# Altium PCB MainPCB.PcbDoc (part 4 of 4)
Units mil, origin at the board's own origin, x right, y up, seen from the top; angles counter-clockwise.
Board outline 3543.31 x 3543.31 mil, 2 copper layers (Top Layer, Bottom Layer); 134 components, 141 nets, 686 pads, 3686 vias.
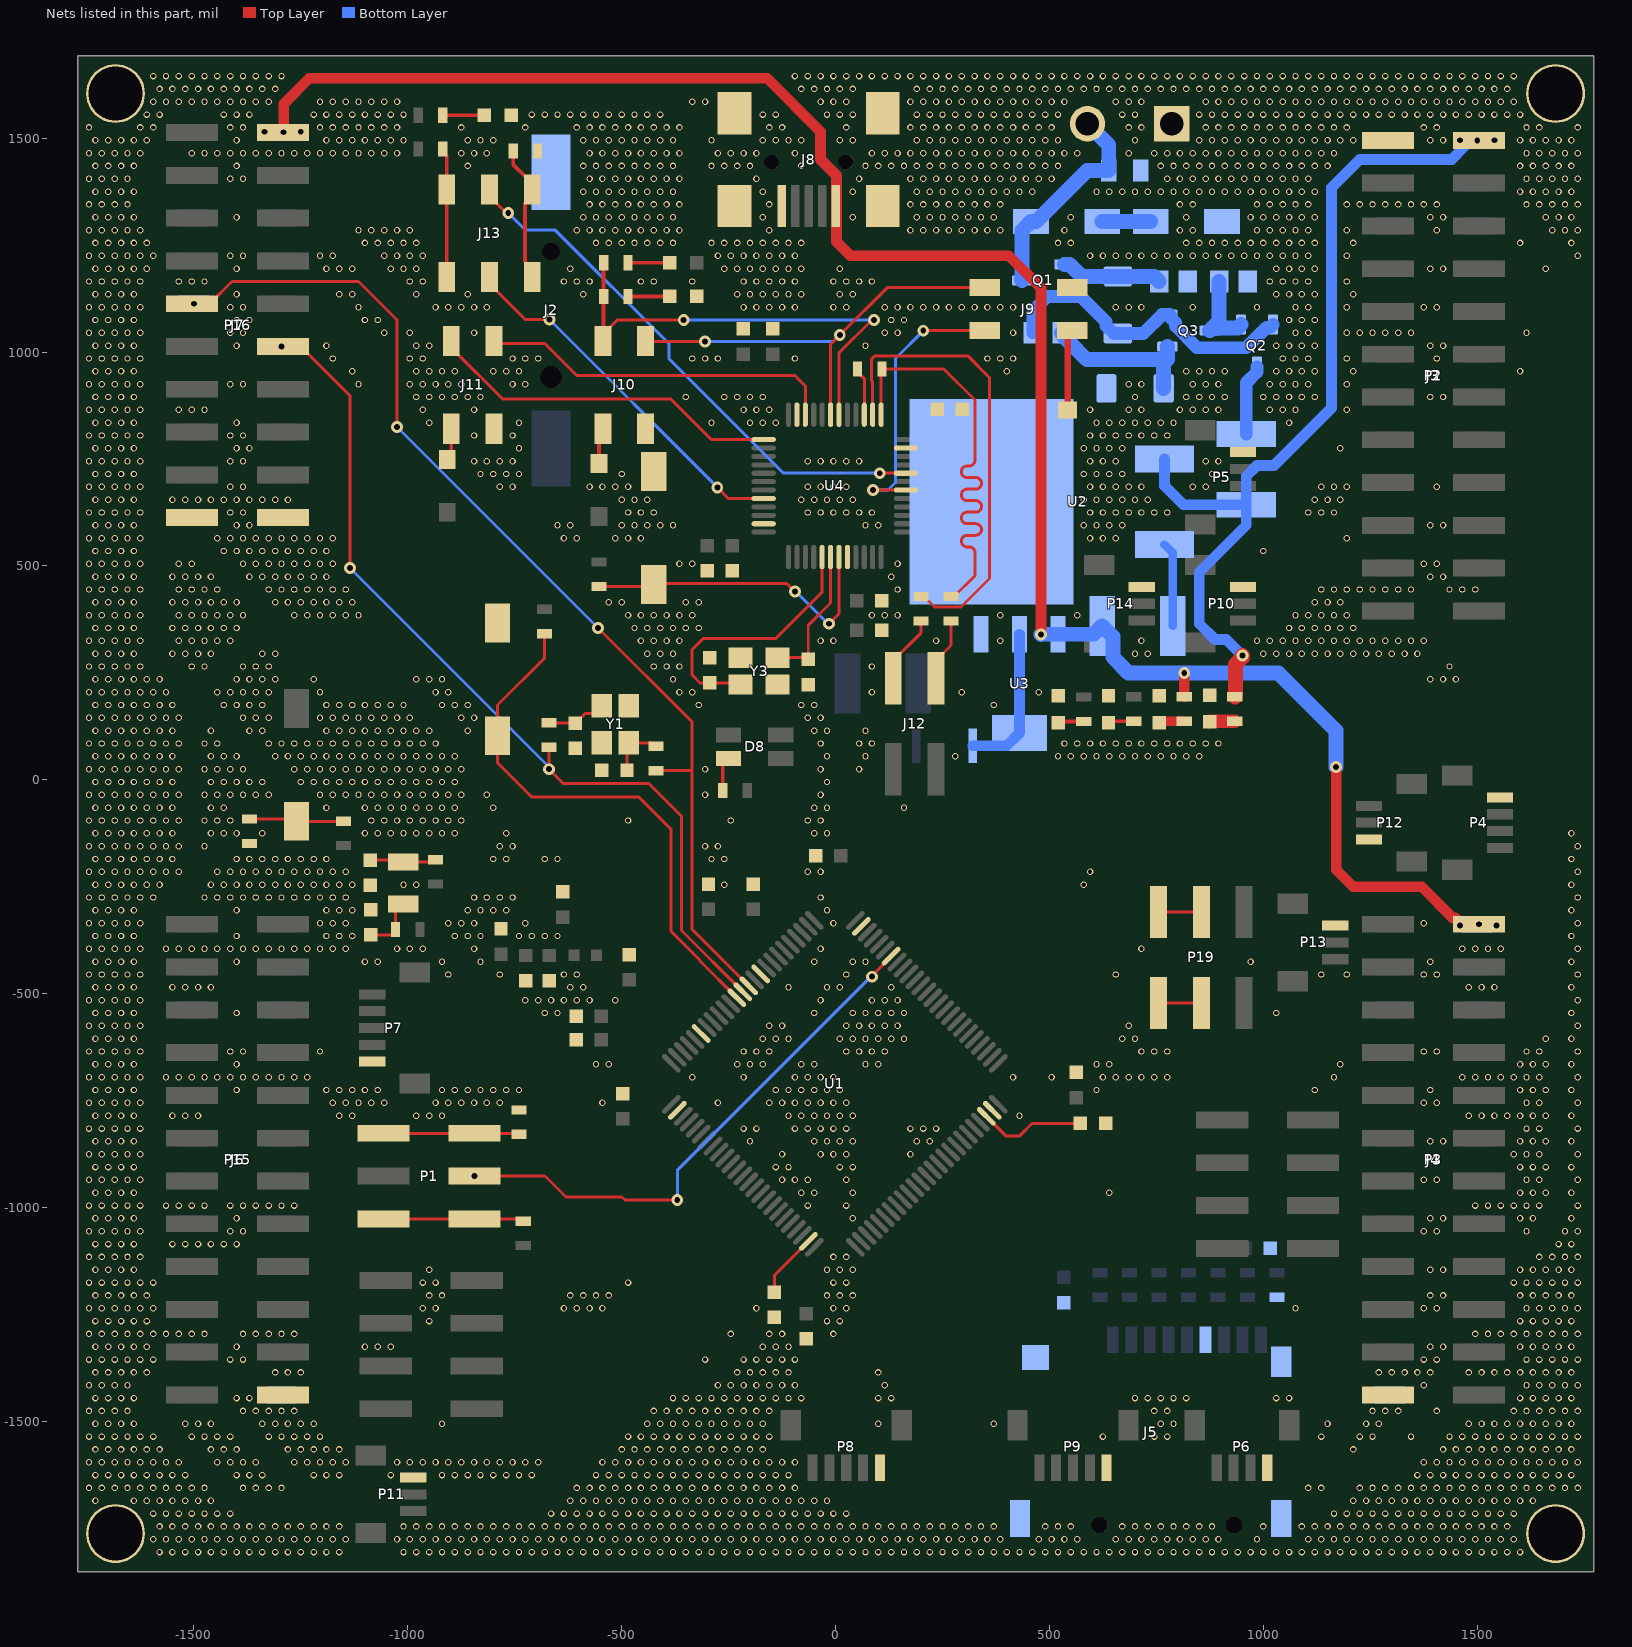
[diagram p3: the nets of this part, all layers, seen from the top]

## Via types
v1: diameter 15/15 (per signal layer), hole 10, Top Layer to Bottom Layer, tented both sides, 3436 vias
v2: diameter 27.56, hole 13.78, Top Layer to Bottom Layer, 250 vias

## Nets (pads, with @x,y where several pads share a name; then routed paths per layer and width w, separated by ;. In a path a pad name is that pad's centre, name@x,y a point inside that pad or via, vN(x,y) a via of type N, cw(c..) or ccw(c..) an arc to the next point about the centre after c; other vN are vias at no path point) (continued)
GND: C1.1 C2.1 C3.1 C4.1 C5.1 C6.1 C7.1 C8.1 C9.1 C10.1 C11.1 C12.1 C13.1 C14.1 C15.1 C16.1 C17.1 C18.1 C19.1 C20.1 C21.1 C22.1 C23.1 C24.1 C25.1 C26.1 C27.1 C28.1 C29.1 C30.1 C31.1 C32.1 D1.1 D4.C D5.A D6.1 D7.1 D9.1 D14.1 D15.1 J1.1 J2.N J3.23 J4.24 J5.6 J5.G1 J5.G2 J5.G3 J5.G4 J6.23 J7.19 J7.20 J8.5 J8.Shell J9.4 J10.4 J11.4 P2.24 P3.23 P4.4 P5.4 P6.4 P7.5 P8.5 P9.5 P10.3 P11.3 P12.3 P13.3 P14.3 P15.24 P16.19 P16.20 R3.1 R10.1 R12.1 R13.1 R22.1 R31.1 Scr1.1 Scr2.1 Scr3.1 Scr4.1 SW2.1 SW3.1 U1.10 U1.20 U1.27 U1.74 U1.99 U2.3 U3.1 U4.8 U4.23 U4.35 U4.47 Y1.2 Y1.4 Y3.2 Y3.4
  other v1: -1580,-1805 -1550,-1805 -1520,-1805 -1490,-1805 -1460,-1805 -1430,-1805 -1400,-1805 -1370,-1805 -1340,-1805 -1310,-1805 -1280,-1805 -1250,-1805 -1220,-1805 -1190,-1805 -1160,-1805 -1010,-1805 -980,-1805 -950,-1805 -920,-1805 -890,-1805 -860,-1805 -830,-1805 -800,-1805 -770,-1805 -740,-1805 -710,-1805 -680,-1805 -650,-1805 -620,-1805 -590,-1805 -560,-1805 -530,-1805 -500,-1805 -470,-1805 -440,-1805 -410,-1805 -380,-1805 -350,-1805 -320,-1805 -290,-1805 -260,-1805 -230,-1805 -200,-1805 -170,-1805 -140,-1805 -110,-1805 -80,-1805 -50,-1805 -20,-1805 10,-1805 40,-1805 70,-1805 100,-1805 130,-1805 160,-1805 190,-1805 220,-1805 250,-1805 280,-1805 310,-1805 340,-1805 370,-1805 400,-1805 430,-1805 460,-1805 490,-1805 520,-1805 550,-1805 580,-1805 610,-1805 640,-1805 670,-1805 700,-1805 730,-1805 760,-1805 790,-1805 820,-1805 850,-1805 880,-1805 910,-1805 940,-1805 970,-1805 1000,-1805 1030,-1805 1060,-1805 1090,-1805 1120,-1805 1150,-1805 1180,-1805 1210,-1805 1240,-1805 1270,-1805 1300,-1805 1330,-1805 1360,-1805 1390,-1805 1420,-1805 1450,-1805 1480,-1805 1510,-1805 1540,-1805 1570,-1805 1600,-1805 -1595,-1775 -1565,-1775 -1535,-1775 -1505,-1775 -1475,-1775 -1445,-1775 -1415,-1775 -1385,-1775 -1355,-1775 -1325,-1775 -1295,-1775 -1265,-1775 -1235,-1775 -1205,-1775 -1175,-1775 -1145,-1775 -1025,-1775 -995,-1775 -965,-1775 -935,-1775 -905,-1775 -875,-1775 -845,-1775 -815,-1775 -785,-1775 -755,-1775 -725,-1775 -695,-1775 -665,-1775 -635,-1775 -605,-1775 -575,-1775 -545,-1775 -515,-1775 -485,-1775 -455,-1775 -425,-1775 -395,-1775 -365,-1775 -335,-1775 -305,-1775 -275,-1775 -245,-1775 -215,-1775 -185,-1775 -155,-1775 -125,-1775 -95,-1775 -65,-1775 -35,-1775 -5,-1775 25,-1775 55,-1775 85,-1775 115,-1775 145,-1775 175,-1775 205,-1775 235,-1775 265,-1775 295,-1775 325,-1775 355,-1775 385,-1775 475,-1775 505,-1775 535,-1775 565,-1775 655,-1775 685,-1775 715,-1775 745,-1775 775,-1775 805,-1775 835,-1775 865,-1775 895,-1775 985,-1775 1105,-1775 1135,-1775 1165,-1775 1195,-1775 1225,-1775 1255,-1775 1285,-1775 1315,-1775 1345,-1775 1375,-1775 1405,-1775 1435,-1775 1465,-1775 1495,-1775 1525,-1775 1555,-1775 1585,-1775 -1580,-1745 -1550,-1745 -1520,-1745 -1490,-1745 -1460,-1745 -1430,-1745 -1400,-1745 -1370,-1745 -1340,-1745 -1310,-1745 -1280,-1745 -1250,-1745 -1220,-1745 -1190,-1745 -1160,-1745 -1010,-1745 -980,-1745 -950,-1745 -920,-1745 -890,-1745 -860,-1745 -830,-1745 -800,-1745 -770,-1745 -740,-1745 -710,-1745 -680,-1745 -650,-1745 -620,-1745 -590,-1745 -560,-1745 -530,-1745 -500,-1745 -470,-1745 -440,-1745 -410,-1745 -380,-1745 -350,-1745 -320,-1745 -290,-1745 -260,-1745 -230,-1745 -200,-1745 -170,-1745 -140,-1745 -110,-1745 -80,-1745 -50,-1745 -20,-1745 10,-1745 40,-1745 70,-1745 100,-1745 130,-1745 160,-1745 190,-1745 220,-1745 250,-1745 280,-1745 310,-1745 340,-1745 370,-1745 490,-1745 520,-1745 550,-1745 670,-1745 700,-1745 730,-1745 760,-1745 790,-1745 820,-1745 850,-1745 880,-1745 1000,-1745 1090,-1745 1120,-1745 1150,-1745 1180,-1745 1210,-1745 1240,-1745 1270,-1745 1300,-1745 1330,-1745 1360,-1745 1390,-1745 1420,-1745 1450,-1745 1480,-1745 1510,-1745 1540,-1745 1570,-1745 -1595,-1715 -1565,-1715 -1535,-1715 -1505,-1715 -1475,-1715 -1445,-1715 -1415,-1715 -665,-1715 -635,-1715 -605,-1715 -575,-1715 -545,-1715 -515,-1715 -485,-1715 -455,-1715 -425,-1715 -395,-1715 -365,-1715 -335,-1715 -305,-1715 -275,-1715 -245,-1715 -215,-1715 -185,-1715 -155,-1715 -125,-1715 -95,-1715 -65,-1715 -35,-1715 -5,-1715 25,-1715 1165,-1715 1195,-1715 1225,-1715 1255,-1715 1285,-1715 1315,-1715 1345,-1715 1375,-1715 1405,-1715 1435,-1715 1465,-1715 1495,-1715 1525,-1715 1555,-1715 1585,-1715 -1730,-1685 -1640,-1685 -1610,-1685 -1580,-1685 -1550,-1685 -1520,-1685 -1490,-1685 -1460,-1685 -620,-1685 -590,-1685 -560,-1685 -530,-1685 -500,-1685 -470,-1685 -440,-1685 -410,-1685 -380,-1685 -350,-1685 -320,-1685 -290,-1685 -260,-1685 -230,-1685 -200,-1685 -170,-1685 -140,-1685 -110,-1685 -80,-1685 -50,-1685 -20,-1685 1210,-1685 1240,-1685 1270,-1685 1300,-1685 1330,-1685 1360,-1685 1390,-1685 1420,-1685 1450,-1685 1480,-1685 1510,-1685 1540,-1685 1570,-1685 1600,-1685 1630,-1685 -1745,-1655 -1715,-1655 -1685,-1655 -1655,-1655 -1625,-1655 -1595,-1655 -1565,-1655 -1535,-1655 -1505,-1655 -1475,-1655 -1385,-1655 -1355,-1655 -1325,-1655 -1295,-1655 -605,-1655 -575,-1655 -545,-1655 -515,-1655 -485,-1655 -455,-1655 -425,-1655 -395,-1655 -365,-1655 -335,-1655 -305,-1655 -275,-1655 -245,-1655 -215,-1655 -185,-1655 -155,-1655 -125,-1655 -95,-1655 1105,-1655 1135,-1655 1225,-1655 1255,-1655 1285,-1655 1315,-1655 1345,-1655 1375,-1655 1405,-1655 1435,-1655 1465,-1655 1495,-1655 1525,-1655 1555,-1655 1585,-1655 1615,-1655 1645,-1655 1675,-1655 1705,-1655 1735,-1655 -1730,-1625 -1700,-1625 -1670,-1625 -1640,-1625 -1610,-1625 -1580,-1625 -1550,-1625 -1520,-1625 -1400,-1625 -1370,-1625 -1340,-1625 -1220,-1625 -1190,-1625 -1160,-1625 -1040,-1625 -920,-1625 -890,-1625 -860,-1625 -830,-1625 -800,-1625 -770,-1625 -740,-1625 -710,-1625 -560,-1625 -530,-1625 -500,-1625 -470,-1625 -440,-1625 -410,-1625 -380,-1625 -350,-1625 -320,-1625 -290,-1625 -260,-1625 -230,-1625 -200,-1625 -170,-1625 -140,-1625 -110,-1625 1360,-1625 1390,-1625 1420,-1625 1450,-1625 1480,-1625 1510,-1625 1540,-1625 1570,-1625 1600,-1625 1630,-1625 1660,-1625 1690,-1625 1720,-1625 -1745,-1595 -1715,-1595 -1685,-1595 -1655,-1595 -1625,-1595 -1595,-1595 -1565,-1595 -1535,-1595 -1445,-1595 -1415,-1595 -1385,-1595 -1355,-1595 -1265,-1595 -1235,-1595 -1205,-1595 -1175,-1595 -1145,-1595 -1025,-1595 -995,-1595 -965,-1595 -935,-1595 -905,-1595 -875,-1595 -845,-1595 -815,-1595 -785,-1595 -755,-1595 -725,-1595 -695,-1595 -545,-1595 -515,-1595 -485,-1595 -455,-1595 -425,-1595 -395,-1595 -365,-1595 -335,-1595 -305,-1595 -275,-1595 -245,-1595 -215,-1595 -185,-1595 -155,-1595 -125,-1595 -95,-1595 1375,-1595 1405,-1595 1435,-1595 1465,-1595 1495,-1595 1525,-1595 1555,-1595 1585,-1595 1615,-1595 1645,-1595 1675,-1595 1705,-1595 1735,-1595 -1730,-1565 -1700,-1565 -1670,-1565 -1640,-1565 -1610,-1565 -1580,-1565 -1460,-1565 -1430,-1565 -1400,-1565 -1280,-1565 -1250,-1565 -1220,-1565 -1190,-1565 -1160,-1565 -500,-1565 -470,-1565 -440,-1565 -410,-1565 -380,-1565 -350,-1565 -320,-1565 -290,-1565 -260,-1565 -230,-1565 -200,-1565 -170,-1565 1210,-1565 1420,-1565 1450,-1565 1480,-1565 1510,-1565 1540,-1565 1570,-1565 1600,-1565 1630,-1565 1660,-1565 1690,-1565 1720,-1565 -1745,-1535 -1715,-1535 -1685,-1535 -1655,-1535 -1625,-1535 -1595,-1535 -1505,-1535 -1475,-1535 -1445,-1535 -1415,-1535 -1325,-1535 -1295,-1535 -1265,-1535 -1235,-1535 -1205,-1535 -485,-1535 -455,-1535 -425,-1535 -395,-1535 -365,-1535 -335,-1535 -305,-1535 -275,-1535 -245,-1535 -215,-1535 -185,-1535 -155,-1535 625,-1535 745,-1535 775,-1535 1135,-1535 1225,-1535 1255,-1535 1345,-1535 1435,-1535 1465,-1535 1495,-1535 1525,-1535 1555,-1535 1585,-1535 1615,-1535 1645,-1535 1675,-1535 1705,-1535 1735,-1535 -1730,-1505 -1700,-1505 -1670,-1505 -1640,-1505 -1520,-1505 -1490,-1505 -1460,-1505 -1340,-1505 -1310,-1505 -1280,-1505 -1250,-1505 -1220,-1505 -920,-1505 -440,-1505 -410,-1505 -380,-1505 -350,-1505 -320,-1505 -290,-1505 -260,-1505 -230,-1505 -200,-1505 -170,-1505 100,-1505 370,-1505 760,-1505 790,-1505 1150,-1505 1240,-1505 1270,-1505 1480,-1505 1510,-1505 1540,-1505 1570,-1505 1600,-1505 1630,-1505 1660,-1505 1690,-1505 1720,-1505 -1745,-1475 -1715,-1475 -1685,-1475 -1655,-1475 -1385,-1475 -1355,-1475 -1325,-1475 -1295,-1475 -1265,-1475 -425,-1475 -395,-1475 -365,-1475 -335,-1475 -305,-1475 -275,-1475 -245,-1475 -215,-1475 -185,-1475 -155,-1475 745,-1475 775,-1475 1255,-1475 1285,-1475 1315,-1475 1405,-1475 1585,-1475 1615,-1475 1645,-1475 1675,-1475 1705,-1475 1735,-1475 -1730,-1445 -1700,-1445 -1670,-1445 -1640,-1445 -1400,-1445 -1370,-1445 -380,-1445 -350,-1445 -320,-1445 -290,-1445 -260,-1445 -230,-1445 -200,-1445 -170,-1445 -140,-1445 -110,-1445 -80,-1445 100,-1445 130,-1445 700,-1445 730,-1445 760,-1445 790,-1445 820,-1445 1030,-1445 1060,-1445 1600,-1445 1630,-1445 1660,-1445 1690,-1445 1720,-1445 -1745,-1415 -1715,-1415 -1685,-1415 -1655,-1415 -275,-1415 -245,-1415 -215,-1415 -185,-1415 -155,-1415 -125,-1415 -95,-1415 115,-1415 1375,-1415 1615,-1415 1645,-1415 1675,-1415 1705,-1415 1735,-1415 -1730,-1385 -1700,-1385 -1670,-1385 -1640,-1385 -1610,-1385 -1310,-1385 -1280,-1385 -1250,-1385 -230,-1385 -200,-1385 -170,-1385 -140,-1385 -110,-1385 100,-1385 1270,-1385 1300,-1385 1330,-1385 1360,-1385 1390,-1385 1480,-1385 1510,-1385 1540,-1385 1570,-1385 1600,-1385 1630,-1385 1660,-1385 1690,-1385 1720,-1385 -1745,-1355 -1715,-1355 -1685,-1355 -1655,-1355 -1625,-1355 -1595,-1355 -1415,-1355 -1385,-1355 -305,-1355 -215,-1355 -185,-1355 -155,-1355 -125,-1355 -95,-1355 1375,-1355 1405,-1355 1615,-1355 1645,-1355 1675,-1355 1705,-1355 1735,-1355 -1730,-1325 -1700,-1325 -1670,-1325 -1640,-1325 -1610,-1325 -1400,-1325 -1100,-1325 -1070,-1325 -1040,-1325 -170,-1325 -140,-1325 -110,-1325 1390,-1325 1420,-1325 1600,-1325 1630,-1325 1660,-1325 1690,-1325 1720,-1325 -1745,-1295 -1715,-1295 -1685,-1295 -1655,-1295 -1625,-1295 -1595,-1295 -1565,-1295 -1535,-1295 -1505,-1295 -1475,-1295 -1385,-1295 -1355,-1295 -1325,-1295 -1295,-1295 -1265,-1295 -245,-1295 -155,-1295 -125,-1295 -5,-1295 1495,-1295 1525,-1295 1555,-1295 1585,-1295 1615,-1295 1645,-1295 1675,-1295 1705,-1295 1735,-1295 -1730,-1265 -1700,-1265 -1670,-1265 -1640,-1265 -1610,-1265 -950,-1265 -20,-1265 10,-1265 1600,-1265 1630,-1265 1660,-1265 1690,-1265 1720,-1265 -1745,-1235 -1715,-1235 -1685,-1235 -1655,-1235 -1625,-1235 -1595,-1235 -965,-1235 -935,-1235 -635,-1235 -605,-1235 -575,-1235 -545,-1235 -185,-1235 -5,-1235 25,-1235 1075,-1235 1375,-1235 1405,-1235 1615,-1235 1645,-1235 1675,-1235 1705,-1235 1735,-1235 -1730,-1205 -1700,-1205 -1670,-1205 -1640,-1205 -1610,-1205 -950,-1205 -920,-1205 -620,-1205 -590,-1205 -560,-1205 -530,-1205 -20,-1205 10,-1205 40,-1205 1390,-1205 1420,-1205 1600,-1205 1630,-1205 1660,-1205 1690,-1205 1720,-1205 -1745,-1175 -1715,-1175 -1685,-1175 -1655,-1175 -1625,-1175 -1595,-1175 -965,-1175 -935,-1175 -485,-1175 -5,-1175 25,-1175 1585,-1175 1615,-1175 1645,-1175 1675,-1175 1705,-1175 1735,-1175 -1730,-1145 -1700,-1145 -1670,-1145 -1640,-1145 -950,-1145 -20,-1145 10,-1145 40,-1145 1390,-1145 1420,-1145 1600,-1145 1630,-1145 1660,-1145 1690,-1145 1720,-1145 -1745,-1115 -1715,-1115 -1685,-1115 -1655,-1115 -1625,-1115 -5,-1115 25,-1115 1645,-1115 1675,-1115 1705,-1115 1735,-1115 -1730,-1085 -1700,-1085 -1670,-1085 -1640,-1085 -1550,-1085 -1520,-1085 -1490,-1085 -1460,-1085 -1430,-1085 -1400,-1085 1690,-1085 1720,-1085 -1745,-1055 -1715,-1055 -1685,-1055 -1655,-1055 -1625,-1055 -1415,-1055 -1385,-1055 1375,-1055 1405,-1055 1615,-1055 1705,-1055 1735,-1055 -1730,-1025 -1700,-1025 -1670,-1025 -1640,-1025 -1400,-1025 40,-1025 1390,-1025 1420,-1025 1600,-1025 1630,-1025 1720,-1025 -1745,-995 -1715,-995 -1685,-995 -1655,-995 -1625,-995 -1565,-995 -1535,-995 -1505,-995 -1475,-995 -1415,-995 -1385,-995 -1355,-995 -1325,-995 -1295,-995 -1265,-995 -65,-995 25,-995 1495,-995 1525,-995 1555,-995 1585,-995 1615,-995 1645,-995 1735,-995 -1730,-965 -1700,-965 -1670,-965 -1640,-965 -80,-965 -50,-965 40,-965 640,-965 1600,-965 1630,-965 1660,-965 1720,-965 -1745,-935 -1715,-935 -1685,-935 -1655,-935 -1625,-935 -125,-935 -95,-935 -65,-935 25,-935 1375,-935 1405,-935 1615,-935 1645,-935 1735,-935 -1730,-905 -1700,-905 -1670,-905 -1640,-905 -140,-905 -110,-905 10,-905 40,-905 1600,-905 1630,-905 1660,-905 1720,-905 -1745,-875 -1715,-875 -1685,-875 -1655,-875 -1625,-875 -125,-875 -35,-875 -5,-875 25,-875 175,-875 1585,-875 1615,-875 1645,-875 1735,-875 -1730,-845 -1700,-845 -1670,-845 -1640,-845 -200,-845 -50,-845 -20,-845 10,-845 40,-845 190,-845 220,-845 1390,-845 1420,-845 1600,-845 1630,-845 1660,-845 1720,-845 -1745,-815 -1715,-815 -1685,-815 -1655,-815 -1625,-815 -215,-815 -185,-815 -95,-815 -65,-815 -35,-815 -5,-815 25,-815 175,-815 205,-815 235,-815 1615,-815 1645,-815 1735,-815 -1730,-785 -1700,-785 -1670,-785 -1640,-785 -1550,-785 -1520,-785 -1490,-785 -1160,-785 -1130,-785 -980,-785 -950,-785 -920,-785 -110,-785 -80,-785 -50,-785 -20,-785 10,-785 40,-785 430,-785 1480,-785 1510,-785 1540,-785 1570,-785 1600,-785 1630,-785 1660,-785 1720,-785 -1745,-755 -1715,-755 -1685,-755 -1655,-755 -1625,-755 -1175,-755 -1145,-755 -1115,-755 -1085,-755 -1055,-755 -935,-755 -905,-755 -875,-755 -845,-755 -815,-755 -785,-755 -545,-755 -275,-755 -155,-755 -125,-755 -95,-755 -65,-755 -35,-755 -5,-755 25,-755 1375,-755 1405,-755 1615,-755 1645,-755 1735,-755 -1730,-725 -1700,-725 -1670,-725 -1640,-725 -1400,-725 -1190,-725 -1160,-725 -1130,-725 -1100,-725 -1070,-725 -920,-725 -890,-725 -860,-725 -830,-725 -800,-725 -770,-725 -740,-725 -140,-725 -110,-725 -80,-725 -50,-725 -20,-725 10,-725 610,-725 1120,-725 1390,-725 1600,-725 1630,-725 1660,-725 1720,-725 -1745,-695 -1715,-695 -1685,-695 -1655,-695 -1625,-695 -1565,-695 -1535,-695 -1505,-695 -1475,-695 -1445,-695 -1415,-695 -1385,-695 -1355,-695 -1325,-695 -1295,-695 -1265,-695 -1235,-695 -335,-695 -215,-695 -95,-695 -65,-695 -35,-695 -5,-695 415,-695 505,-695 625,-695 655,-695 685,-695 715,-695 745,-695 775,-695 1165,-695 1465,-695 1495,-695 1525,-695 1555,-695 1585,-695 1615,-695 1645,-695 1735,-695 -1730,-665 -1700,-665 -1670,-665 -1640,-665 -1400,-665 -560,-665 -530,-665 -230,-665 -200,-665 -170,-665 -80,-665 -50,-665 70,-665 100,-665 610,-665 640,-665 1180,-665 1600,-665 1630,-665 1660,-665 1720,-665 -1745,-635 -1715,-635 -1685,-635 -1655,-635 -1625,-635 -1415,-635 -1385,-635 -1205,-635 -215,-635 -185,-635 -155,-635 25,-635 55,-635 85,-635 115,-635 715,-635 745,-635 775,-635 1375,-635 1405,-635 1615,-635 1645,-635 1735,-635 -1730,-605 -1700,-605 -1670,-605 -1640,-605 -170,-605 -140,-605 -110,-605 10,-605 40,-605 70,-605 100,-605 130,-605 160,-605 670,-605 700,-605 1660,-605 1720,-605 -1745,-575 -1715,-575 -1685,-575 -1655,-575 -1625,-575 -155,-575 -125,-575 25,-575 55,-575 85,-575 115,-575 145,-575 685,-575 1735,-575 -1730,-545 -1700,-545 -1670,-545 -1640,-545 -1400,-545 -680,-545 -650,-545 -50,-545 40,-545 70,-545 100,-545 130,-545 160,-545 1030,-545 1720,-545 -1745,-515 -1715,-515 -1685,-515 -1655,-515 -1625,-515 -725,-515 -695,-515 -665,-515 -635,-515 -605,-515 -575,-515 -515,-515 -35,-515 85,-515 115,-515 145,-515 1735,-515 -1730,-485 -1700,-485 -1670,-485 -1640,-485 -1550,-485 -1520,-485 -1490,-485 -1460,-485 -620,-485 -590,-485 -110,-485 -20,-485 10,-485 130,-485 1480,-485 1510,-485 1540,-485 1720,-485 -1745,-455 -1715,-455 -1685,-455 -1655,-455 -1625,-455 -905,-455 -785,-455 -635,-455 -605,-455 25,-455 655,-455 1135,-455 1195,-455 1375,-455 1405,-455 1735,-455 -1730,-425 -1700,-425 -1670,-425 -1640,-425 -1400,-425 -1100,-425 -1070,-425 -920,-425 -830,-425 -50,-425 40,-425 70,-425 970,-425 1390,-425 1720,-425 -1745,-395 -1715,-395 -1685,-395 -1655,-395 -1625,-395 -1565,-395 -1535,-395 -1505,-395 -1475,-395 -1445,-395 -1415,-395 -1385,-395 -1355,-395 -1325,-395 -1295,-395 -1265,-395 -1235,-395 -1205,-395 -1175,-395 -1145,-395 -1025,-395 -995,-395 -965,-395 -845,-395 -35,-395 715,-395 1465,-395 1495,-395 1525,-395 1555,-395 1735,-395 -1730,-365 -1700,-365 -1670,-365 -1640,-365 -1400,-365 -1190,-365 -1160,-365 -1130,-365 -890,-365 -860,-365 -830,-365 -740,-365 -710,-365 -680,-365 -650,-365 1720,-365 -1745,-335 -1715,-335 -1685,-335 -1655,-335 -1625,-335 -1205,-335 -1175,-335 -1145,-335 -905,-335 -875,-335 -845,-335 -725,-335 -5,-335 1375,-335 1735,-335 -1730,-305 -1700,-305 -1670,-305 -1640,-305 -1400,-305 -1190,-305 -1160,-305 -1130,-305 -860,-305 -830,-305 -800,-305 -770,-305 -20,-305 1720,-305 -1745,-275 -1715,-275 -1685,-275 -1655,-275 -1625,-275 -1595,-275 -1475,-275 -1445,-275 -1415,-275 -1385,-275 -1355,-275 -1325,-275 -1295,-275 -1265,-275 -1235,-275 -1205,-275 -1175,-275 -1145,-275 -845,-275 -815,-275 -785,-275 -755,-275 -35,-275 1735,-275 -1730,-245 -1700,-245 -1670,-245 -1640,-245 -1610,-245 -1580,-245 -1460,-245 -1430,-245 -1400,-245 -1370,-245 -1340,-245 -1310,-245 -1280,-245 -1250,-245 -1220,-245 -1190,-245 -1160,-245 -1130,-245 -1010,-245 -980,-245 -260,-245 580,-245 1720,-245 -1745,-215 -1715,-215 -1685,-215 -1655,-215 -1625,-215 -1595,-215 -1565,-215 -1535,-215 -1445,-215 -1415,-215 -1385,-215 -1355,-215 -1325,-215 -1295,-215 -1265,-215 -1235,-215 -1205,-215 -1175,-215 -1145,-215 -65,-215 -35,-215 595,-215 1735,-215 -1730,-185 -1700,-185 -1670,-185 -1640,-185 -1610,-185 -1580,-185 -1550,-185 -1400,-185 -1370,-185 -1340,-185 -1310,-185 -1280,-185 -1250,-185 -1220,-185 -1190,-185 -800,-185 -770,-185 -680,-185 -650,-185 -290,-185 -260,-185 1720,-185 -1745,-155 -1715,-155 -1685,-155 -1655,-155 -1625,-155 -1595,-155 -1565,-155 -1535,-155 -1475,-155 -785,-155 -755,-155 -305,-155 -275,-155 1735,-155 -1730,-125 -1700,-125 -1670,-125 -1640,-125 -1610,-125 -1580,-125 -1550,-125 -1460,-125 -1430,-125 -1400,-125 -1340,-125 -1100,-125 -1070,-125 -1040,-125 -1010,-125 -980,-125 -950,-125 -920,-125 -890,-125 -770,-125 -50,-125 -20,-125 1720,-125 -1745,-95 -1715,-95 -1685,-95 -1655,-95 -1625,-95 -1595,-95 -1565,-95 -1535,-95 -1475,-95 -1445,-95 -1415,-95 -1085,-95 -1055,-95 -1025,-95 -995,-95 -965,-95 -935,-95 -905,-95 -875,-95 -485,-95 -245,-95 -65,-95 -35,-95 -1730,-65 -1700,-65 -1670,-65 -1640,-65 -1610,-65 -1580,-65 -1550,-65 -1460,-65 -1430,-65 -1190,-65 -1100,-65 -1070,-65 -1040,-65 -1010,-65 -980,-65 -950,-65 -920,-65 -890,-65 -800,-65 -50,-65 -20,-65 160,-65 -1745,-35 -1715,-35 -1685,-35 -1655,-35 -1625,-35 -1595,-35 -1565,-35 -1535,-35 -1475,-35 -1445,-35 -1415,-35 -1385,-35 -1355,-35 -1325,-35 -1205,-35 -1175,-35 -1145,-35 -1115,-35 -1085,-35 -1055,-35 -1025,-35 -995,-35 -965,-35 -935,-35 -905,-35 -875,-35 -815,-35 -305,-35 -35,-35 -1730,-5 -1700,-5 -1670,-5 -1640,-5 -1610,-5 -1580,-5 -1550,-5 -1460,-5 -1430,-5 -1400,-5 -1370,-5 -1340,-5 -1250,-5 -1220,-5 -1190,-5 -1160,-5 -1130,-5 -1100,-5 -1070,-5 -1040,-5 -1010,-5 -980,-5 -950,-5 -920,-5 -890,-5 -20,-5 -1745,25 -1715,25 -1685,25 -1655,25 -1625,25 -1595,25 -1565,25 -1535,25 -1475,25 -1445,25 -1415,25 -1385,25 -1265,25 -1235,25 -1205,25 -1175,25 -1145,25 -1115,25 -1085,25 -1055,25 -1025,25 -995,25 -965,25 -935,25 -905,25 -875,25 -305,25 -35,25 55,25 -1730,55 -1700,55 -1670,55 -1640,55 -1610,55 -1580,55 -1550,55 -1460,55 -1430,55 -1400,55 -1310,55 -1280,55 -1250,55 -1220,55 -1190,55 -1160,55 -1130,55 -1100,55 -1070,55 -1040,55 -1010,55 -980,55 -950,55 -920,55 -890,55 -20,55 70,55 280,55 520,55 550,55 580,55 610,55 640,55 670,55 700,55 730,55 760,55 790,55 820,55 850,55 -1745,85 -1715,85 -1685,85 -1655,85 -1625,85 -1595,85 -1565,85 -1535,85 -1475,85 -1445,85 -1325,85 -1295,85 -1265,85 -1235,85 -1205,85 -1175,85 -1145,85 -1115,85 -1085,85 -1055,85 -1025,85 -995,85 -965,85 -935,85 -35,85 55,85 85,85 535,85 565,85 595,85 625,85 655,85 685,85 715,85 745,85 775,85 805,85 835,85 865,85 895,85 -1730,115 -1700,115 -1670,115 -1640,115 -1610,115 -1580,115 -1550,115 -1460,115 -1370,115 -1340,115 -1190,115 -1160,115 -1130,115 -1100,115 -1070,115 -1040,115 -1010,115 -980,115 -950,115 -860,115 -50,115 -20,115 70,115 -1745,145 -1715,145 -1685,145 -1655,145 -1625,145 -1595,145 -1565,145 -1535,145 -1385,145 -1355,145 -1325,145 -1205,145 -1175,145 -1145,145 -1115,145 -1085,145 -1055,145 -1025,145 -995,145 -875,145 -845,145 -65,145 -35,145 -1730,175 -1700,175 -1670,175 -1640,175 -1610,175 -1580,175 -1550,175 -1430,175 -1400,175 -1370,175 -1340,175 -1190,175 -1160,175 -1130,175 -1100,175 -1070,175 -1040,175 -1010,175 -920,175 -890,175 -860,175 -320,175 -80,175 -50,175 370,175 -1745,205 -1715,205 -1685,205 -1655,205 -1625,205 -1595,205 -1565,205 -1445,205 -1415,205 -1385,205 -1355,205 -1325,205 -1205,205 -935,205 -905,205 -365,205 -335,205 85,205 295,205 475,205 -1730,235 -1700,235 -1670,235 -1640,235 -1610,235 -1580,235 -1400,235 -1370,235 -1340,235 -1310,235 -1220,235 -980,235 -950,235 -920,235 -380,235 1390,235 1420,235 1450,235 -1745,265 -1715,265 -1685,265 -1655,265 -1625,265 -1505,265 -1475,265 -1385,265 -1355,265 -1325,265 -425,265 -395,265 -365,265 85,265 1435,265 -1730,295 -1700,295 -1670,295 -1640,295 -1550,295 -1520,295 -1490,295 -1460,295 -1340,295 -1310,295 -440,295 -410,295 -380,295 700,295 730,295 1000,295 1030,295 1060,295 1090,295 1120,295 1150,295 1180,295 1210,295 1240,295 1270,295 1300,295 1330,295 1360,295 -1745,325 -1715,325 -1685,325 -1655,325 -1625,325 -1535,325 -1505,325 -1475,325 -1445,325 -1415,325 -455,325 -425,325 -395,325 -365,325 -35,325 -5,325 235,325 385,325 715,325 985,325 1015,325 1045,325 1075,325 1105,325 1135,325 1165,325 1195,325 1225,325 1255,325 1285,325 1315,325 1345,325 1375,325 -1730,355 -1700,355 -1670,355 -1640,355 -1550,355 -1520,355 -1490,355 -1460,355 -1430,355 -1400,355 -470,355 -440,355 -410,355 -380,355 -350,355 -320,355 1060,355 1090,355 1120,355 1150,355 1180,355 1210,355 -1745,385 -1715,385 -1685,385 -1655,385 -1625,385 -1535,385 -1505,385 -1475,385 -1445,385 -1415,385 -1385,385 -1265,385 -1235,385 -1205,385 -1175,385 -1145,385 -1115,385 -485,385 -455,385 -425,385 -395,385 -365,385 -335,385 85,385 115,385 145,385 385,385 565,385 1075,385 1105,385 1135,385 1165,385 1195,385 -1730,415 -1700,415 -1670,415 -1640,415 -1550,415 -1520,415 -1490,415 -1460,415 -1430,415 -1400,415 -1310,415 -1280,415 -1250,415 -1220,415 -1190,415 -1160,415 -1130,415 -530,415 -500,415 -350,415 -320,415 1120,415 1150,415 1180,415 -1745,445 -1715,445 -1685,445 -1655,445 -1625,445 -1535,445 -1505,445 -1475,445 -1445,445 -1325,445 -1295,445 -1265,445 -1235,445 -1205,445 -1175,445 -1145,445 145,445 1135,445 1165,445 1195,445 1225,445 1255,445 1285,445 1315,445 1345,445 1435,445 1465,445 1495,445 -1730,475 -1700,475 -1670,475 -1640,475 -1550,475 -1520,475 -1490,475 -1460,475 -1370,475 -1340,475 -1310,475 -1280,475 -1250,475 -1220,475 -1190,475 130,475 1390,475 1420,475 -1745,505 -1715,505 -1685,505 -1655,505 -1625,505 -1535,505 -1505,505 -1385,505 -1355,505 -1325,505 -1295,505 -1265,505 -1235,505 -1205,505 -1175,505 -365,505 -335,505 145,505 1375,505 1405,505 -1730,535 -1700,535 -1670,535 -1640,535 -1430,535 -1400,535 -1370,535 -1340,535 -1310,535 -1280,535 -1250,535 -1220,535 -1190,535 1000,535 -1745,565 -1715,565 -1685,565 -1655,565 -1625,565 -1445,565 -1415,565 -1385,565 -1355,565 -1325,565 -1295,565 -1265,565 -1235,565 -1205,565 -1175,565 -635,565 -605,565 -515,565 -485,565 -455,565 595,565 625,565 655,565 1195,565 -1730,595 -1700,595 -1670,595 -1640,595 -1400,595 -1370,595 -650,595 -620,595 -500,595 -470,595 -440,595 -410,595 -380,595 70,595 100,595 580,595 610,595 640,595 670,595 1390,595 1420,595 -1745,625 -1715,625 -1685,625 -1655,625 -1625,625 -1415,625 -1385,625 -485,625 -455,625 -425,625 -65,625 -35,625 -5,625 25,625 55,625 85,625 595,625 625,625 655,625 685,625 715,625 745,625 775,625 1105,625 1135,625 1165,625 -1730,655 -1700,655 -1670,655 -1640,655 -1550,655 -1520,655 -1490,655 -1460,655 -1430,655 -1400,655 -1370,655 -1340,655 -1310,655 -1280,655 -500,655 -470,655 -440,655 -80,655 -50,655 -20,655 10,655 40,655 580,655 610,655 640,655 670,655 700,655 730,655 1120,655 1150,655 1180,655 -1745,685 -1715,685 -1685,685 -1655,685 -1625,685 -1415,685 -1385,685 -785,685 -755,685 -575,685 -545,685 -515,685 -485,685 -65,685 -35,685 -5,685 25,685 595,685 625,685 655,685 685,685 715,685 835,685 865,685 1135,685 1165,685 1195,685 1405,685 -1730,715 -1700,715 -1670,715 -1640,715 -830,715 -800,715 -770,715 -740,715 -500,715 580,715 610,715 640,715 670,715 880,715 -1745,745 -1715,745 -1685,745 -1655,745 -1625,745 -1415,745 -1385,745 -845,745 -815,745 -785,745 -755,745 -65,745 -35,745 -5,745 25,745 55,745 595,745 625,745 655,745 865,745 895,745 -1730,775 -1700,775 -1670,775 -1640,775 -1400,775 -1370,775 -740,775 580,775 610,775 640,775 670,775 1180,775 -1745,805 -1715,805 -1685,805 -1655,805 -1625,805 -1415,805 -1385,805 -845,805 -755,805 595,805 625,805 655,805 685,805 715,805 745,805 775,805 -1730,835 -1700,835 -1670,835 -1640,835 -1400,835 -950,835 -740,835 -290,835 -200,835 -170,835 -140,835 610,835 640,835 670,835 700,835 730,835 760,835 790,835 1060,835 -1745,865 -1715,865 -1685,865 -1655,865 -1625,865 -1535,865 -1505,865 -1475,865 -965,865 -845,865 -215,865 -185,865 -155,865 595,865 685,865 715,865 805,865 835,865 865,865 895,865 1015,865 1045,865 1075,865 1195,865 -1730,895 -1700,895 -1670,895 -1640,895 -980,895 -950,895 -920,895 -890,895 -860,895 -830,895 -350,895 -260,895 -230,895 -200,895 -170,895 700,895 820,895 850,895 880,895 910,895 1000,895 1030,895 1060,895 1090,895 1120,895 1390,895 1420,895 -1745,925 -1715,925 -1685,925 -1655,925 -1625,925 -1415,925 -1385,925 -1115,925 -995,925 -965,925 -935,925 -905,925 -875,925 -755,925 -725,925 685,925 715,925 835,925 865,925 895,925 1015,925 1045,925 1075,925 1105,925 1195,925 -1730,955 -1700,955 -1670,955 -1640,955 -1130,955 -980,955 -950,955 -920,955 -890,955 -800,955 -770,955 -740,955 400,955 820,955 850,955 880,955 910,955 1030,955 1060,955 1090,955 1120,955 1210,955 1600,955 -1745,985 -1715,985 -1685,985 -1655,985 -1625,985 -1175,985 -995,985 -965,985 -755,985 -725,985 -695,985 -335,985 -305,985 -275,985 -95,985 355,985 385,985 415,985 1045,985 1075,985 1105,985 1195,985 1405,985 -1730,1015 -1700,1015 -1670,1015 -1640,1015 -1400,1015 -1190,1015 -980,1015 -950,1015 70,1015 1030,1015 1060,1015 1090,1015 1120,1015 1390,1015 1420,1015 -1745,1045 -1715,1045 -1685,1045 -1655,1045 -1625,1045 -1415,1045 -1385,1045 -1055,1045 -995,1045 -845,1045 115,1045 145,1045 415,1045 1075,1045 1105,1045 1195,1045 1225,1045 1255,1045 1285,1045 1315,1045 1345,1045 1615,1045 -1730,1075 -1700,1075 -1670,1075 -1640,1075 -1400,1075 -1370,1075 -1100,1075 -1070,1075 130,1075 160,1075 1060,1075 1090,1075 1120,1075 -1745,1105 -1715,1105 -1685,1105 -1655,1105 -1625,1105 -1415,1105 -1385,1105 -1115,1105 -935,1105 -905,1105 -875,1105 -845,1105 -815,1105 -215,1105 -185,1105 -155,1105 -125,1105 -95,1105 -5,1105 25,1105 115,1105 145,1105 175,1105 205,1105 235,1105 265,1105 295,1105 325,1105 355,1105 385,1105 415,1105 655,1105 685,1105 715,1105 835,1105 985,1105 1075,1105 1105,1105 1195,1105 1375,1105 1405,1105 -1730,1135 -1700,1135 -1670,1135 -1640,1135 -1400,1135 -1160,1135 -1130,1135 -980,1135 -860,1135 -590,1135 -230,1135 -200,1135 -170,1135 -140,1135 -110,1135 -80,1135 10,1135 40,1135 1030,1135 1060,1135 1090,1135 1120,1135 1210,1135 -1745,1165 -1715,1165 -1685,1165 -1655,1165 -1625,1165 -1535,1165 -1505,1165 -1475,1165 -995,1165 -965,1165 -635,1165 -605,1165 -575,1165 -455,1165 -425,1165 -335,1165 -215,1165 -185,1165 -155,1165 -125,1165 -95,1165 -5,1165 25,1165 55,1165 85,1165 1015,1165 1045,1165 1075,1165 1105,1165 1195,1165 -1730,1195 -1700,1195 -1670,1195 -1640,1195 -1610,1195 -1400,1195 -1190,1195 -1160,1195 -1130,1195 -1040,1195 -1010,1195 -980,1195 -620,1195 -260,1195 -230,1195 -200,1195 -170,1195 -140,1195 -110,1195 -80,1195 10,1195 1030,1195 1060,1195 1090,1195 1120,1195 1390,1195 1420,1195 1660,1195 -1745,1225 -1715,1225 -1685,1225 -1655,1225 -1625,1225 -1595,1225 -1415,1225 -1385,1225 -1205,1225 -1175,1225 -1055,1225 -1025,1225 -995,1225 -965,1225 -275,1225 -245,1225 -215,1225 -185,1225 -155,1225 -125,1225 -95,1225 595,1225 625,1225 655,1225 685,1225 715,1225 745,1225 775,1225 805,1225 835,1225 865,1225 895,1225 925,1225 955,1225 985,1225 1015,1225 1045,1225 1075,1225 1105,1225 1195,1225 1735,1225 -1730,1255 -1700,1255 -1670,1255 -1640,1255 -1610,1255 -1100,1255 -1070,1255 -1040,1255 -1010,1255 -980,1255 -560,1255 -530,1255 -500,1255 -470,1255 -440,1255 -410,1255 -380,1255 -290,1255 -260,1255 -230,1255 -200,1255 -170,1255 -140,1255 -110,1255 -80,1255 520,1255 550,1255 820,1255 850,1255 880,1255 910,1255 940,1255 970,1255 1000,1255 1030,1255 1060,1255 1090,1255 1120,1255 1210,1255 1600,1255 1720,1255 -1745,1285 -1715,1285 -1685,1285 -1655,1285 -1625,1285 -1115,1285 -1085,1285 -1055,1285 -1025,1285 -995,1285 -605,1285 -575,1285 -545,1285 -515,1285 -485,1285 -455,1285 -425,1285 -395,1285 -365,1285 -155,1285 175,1285 205,1285 235,1285 265,1285 295,1285 325,1285 355,1285 385,1285 535,1285 805,1285 835,1285 985,1285 1015,1285 1045,1285 1075,1285 1105,1285 1195,1285 1405,1285 1675,1285 1705,1285 1735,1285 -1730,1315 -1700,1315 -1670,1315 -1640,1315 -1400,1315 -590,1315 -560,1315 -530,1315 -500,1315 -470,1315 -440,1315 -410,1315 -380,1315 -170,1315 40,1315 190,1315 220,1315 250,1315 280,1315 310,1315 340,1315 370,1315 550,1315 820,1315 970,1315 1000,1315 1030,1315 1060,1315 1090,1315 1120,1315 1390,1315 1420,1315 1660,1315 1690,1315 1720,1315 -1745,1345 -1715,1345 -1685,1345 -1655,1345 -575,1345 -545,1345 -515,1345 -485,1345 -455,1345 -425,1345 -395,1345 -365,1345 -155,1345 175,1345 205,1345 235,1345 265,1345 295,1345 325,1345 355,1345 385,1345 805,1345 835,1345 985,1345 1015,1345 1045,1345 1075,1345 1105,1345 1195,1345 1225,1345 1255,1345 1285,1345 1315,1345 1345,1345 1375,1345 1405,1345 1615,1345 1645,1345 1675,1345 1705,1345 1735,1345 -1730,1375 -1700,1375 -1670,1375 -1640,1375 -590,1375 -560,1375 -530,1375 -500,1375 -470,1375 -440,1375 -410,1375 -380,1375 -170,1375 40,1375 190,1375 220,1375 250,1375 280,1375 310,1375 340,1375 370,1375 400,1375 430,1375 460,1375 610,1375 640,1375 670,1375 700,1375 730,1375 760,1375 790,1375 820,1375 850,1375 880,1375 910,1375 940,1375 970,1375 1000,1375 1030,1375 1060,1375 1090,1375 1120,1375 1600,1375 1630,1375 1660,1375 1690,1375 1720,1375 -1745,1405 -1715,1405 -1685,1405 -1655,1405 -1415,1405 -1385,1405 -575,1405 -545,1405 -515,1405 -485,1405 -455,1405 -425,1405 -395,1405 -365,1405 -185,1405 55,1405 175,1405 205,1405 235,1405 265,1405 295,1405 325,1405 355,1405 385,1405 415,1405 445,1405 475,1405 505,1405 775,1405 805,1405 835,1405 865,1405 895,1405 925,1405 955,1405 985,1405 1015,1405 1045,1405 1075,1405 1105,1405 1615,1405 1645,1405 1675,1405 1705,1405 1735,1405 -1730,1435 -1700,1435 -1670,1435 -1640,1435 -1400,1435 -860,1435 -590,1435 -560,1435 -530,1435 -500,1435 -470,1435 -440,1435 -410,1435 -380,1435 -290,1435 -260,1435 -230,1435 -200,1435 -80,1435 70,1435 100,1435 130,1435 160,1435 190,1435 220,1435 250,1435 280,1435 310,1435 340,1435 370,1435 400,1435 430,1435 460,1435 490,1435 520,1435 760,1435 790,1435 820,1435 850,1435 880,1435 910,1435 940,1435 970,1435 1000,1435 1030,1435 1060,1435 1090,1435 1120,1435 1150,1435 1600,1435 1630,1435 1660,1435 1690,1435 1720,1435 -1745,1465 -1715,1465 -1685,1465 -1655,1465 -1625,1465 -1505,1465 -1475,1465 -1445,1465 -1415,1465 -1385,1465 -1355,1465 -1325,1465 -1295,1465 -1265,1465 -1235,1465 -1205,1465 -1175,1465 -1145,1465 -1115,1465 -1085,1465 -1055,1465 -1025,1465 -875,1465 -845,1465 -815,1465 -575,1465 -545,1465 -515,1465 -485,1465 -455,1465 -425,1465 -395,1465 -365,1465 -275,1465 -245,1465 -215,1465 -185,1465 -95,1465 85,1465 115,1465 145,1465 175,1465 205,1465 235,1465 265,1465 295,1465 325,1465 355,1465 385,1465 415,1465 445,1465 475,1465 505,1465 535,1465 565,1465 685,1465 745,1465 775,1465 805,1465 835,1465 865,1465 895,1465 925,1465 955,1465 985,1465 1015,1465 1045,1465 1075,1465 1105,1465 1135,1465 1165,1465 1615,1465 1645,1465 1675,1465 1705,1465 1735,1465 -1730,1495 -1700,1495 -1670,1495 -1640,1495 -1610,1495 -1400,1495 -1190,1495 -1160,1495 -1130,1495 -1100,1495 -1070,1495 -1040,1495 -1010,1495 -860,1495 -830,1495 -800,1495 -590,1495 -560,1495 -530,1495 -500,1495 -470,1495 -440,1495 -410,1495 -380,1495 -290,1495 -170,1495 -140,1495 -110,1495 -80,1495 10,1495 40,1495 190,1495 220,1495 250,1495 280,1495 310,1495 340,1495 370,1495 400,1495 430,1495 460,1495 490,1495 520,1495 700,1495 850,1495 880,1495 910,1495 940,1495 970,1495 1000,1495 1030,1495 1060,1495 1090,1495 1120,1495 1150,1495 1180,1495 1210,1495 1390,1495 1420,1495 1600,1495 1630,1495 1660,1495 1690,1495 1720,1495 -1745,1525 -1625,1525 -1595,1525 -1415,1525 -1385,1525 -1205,1525 -1175,1525 -1145,1525 -1115,1525 -1085,1525 -1055,1525 -1025,1525 -875,1525 -725,1525 -605,1525 -575,1525 -545,1525 -515,1525 -485,1525 -455,1525 -425,1525 -395,1525 -365,1525 -155,1525 -125,1525 25,1525 175,1525 205,1525 235,1525 265,1525 295,1525 325,1525 355,1525 385,1525 415,1525 445,1525 475,1525 505,1525 685,1525 715,1525 865,1525 895,1525 925,1525 955,1525 985,1525 1015,1525 1045,1525 1075,1525 1105,1525 1135,1525 1165,1525 1195,1525 1375,1525 1405,1525 1615,1525 1645,1525 1735,1525 -1610,1555 -1580,1555 -1430,1555 -1400,1555 -1370,1555 -1220,1555 -1190,1555 -1160,1555 -1130,1555 -1100,1555 -1070,1555 -1040,1555 -1010,1555 -710,1555 -680,1555 -650,1555 -620,1555 -590,1555 -560,1555 -530,1555 -500,1555 -470,1555 -440,1555 -410,1555 -170,1555 -140,1555 -20,1555 10,1555 40,1555 190,1555 220,1555 250,1555 280,1555 310,1555 340,1555 370,1555 400,1555 430,1555 460,1555 490,1555 520,1555 670,1555 700,1555 850,1555 880,1555 910,1555 940,1555 970,1555 1000,1555 1030,1555 1060,1555 1090,1555 1120,1555 1150,1555 1180,1555 1210,1555 1240,1555 1270,1555 1300,1555 1330,1555 1360,1555 1390,1555 1420,1555 1450,1555 1480,1555 1510,1555 1540,1555 1570,1555 1600,1555 -1595,1585 -1565,1585 -1535,1585 -1505,1585 -1475,1585 -1445,1585 -1415,1585 -1385,1585 -1355,1585 -1325,1585 -1205,1585 -1175,1585 -1145,1585 -1115,1585 -1085,1585 -1055,1585 -1025,1585 -335,1585 -305,1585 -35,1585 -5,1585 25,1585 175,1585 205,1585 235,1585 265,1585 295,1585 325,1585 355,1585 385,1585 415,1585 445,1585 475,1585 505,1585 535,1585 655,1585 685,1585 715,1585 865,1585 895,1585 925,1585 955,1585 985,1585 1015,1585 1045,1585 1075,1585 1105,1585 1135,1585 1165,1585 1195,1585 1225,1585 1255,1585 1285,1585 1315,1585 1345,1585 1375,1585 1405,1585 1435,1585 1465,1585 1495,1585 1525,1585 1555,1585 1585,1585 -1580,1615 -1550,1615 -1520,1615 -1490,1615 -1460,1615 -1430,1615 -1400,1615 -1370,1615 -1340,1615 -1310,1615 -80,1615 -50,1615 -20,1615 10,1615 40,1615 190,1615 220,1615 250,1615 280,1615 310,1615 340,1615 370,1615 400,1615 430,1615 460,1615 490,1615 520,1615 550,1615 580,1615 610,1615 640,1615 670,1615 700,1615 730,1615 760,1615 790,1615 820,1615 850,1615 880,1615 910,1615 940,1615 970,1615 1000,1615 1030,1615 1060,1615 1090,1615 1120,1615 1150,1615 1180,1615 1210,1615 1240,1615 1270,1615 1300,1615 1330,1615 1360,1615 1390,1615 1420,1615 1450,1615 1480,1615 1510,1615 1540,1615 1570,1615 -1595,1645 -1565,1645 -1535,1645 -1505,1645 -1475,1645 -1445,1645 -1415,1645 -1385,1645 -1355,1645 -1325,1645 -1295,1645 -95,1645 -65,1645 -35,1645 -5,1645 25,1645 55,1645 85,1645 115,1645 145,1645 175,1645 205,1645 235,1645 265,1645 295,1645 325,1645 355,1645 385,1645 415,1645 445,1645 475,1645 505,1645 535,1645 565,1645 595,1645 625,1645 655,1645 685,1645 715,1645 745,1645 775,1645 805,1645 835,1645 865,1645 895,1645 925,1645 955,1645 985,1645 1015,1645 1045,1645 1075,1645 1105,1645 1135,1645 1165,1645 1195,1645 1225,1645 1255,1645 1285,1645 1315,1645 1345,1645 1375,1645 1405,1645 1435,1645 1465,1645 1495,1645 1525,1645 1555,1645 1585,1645
H0: J7.10 P16.9 R6.2 U1.12 | length 2520
  Top Layer w7: P16.9@-1503.94,1112.99 v2(-1500,1112.99) -1462.6,1112.99 -1410.59,1165 -1115,1165 -1025,1075 v2(-1025,825) ; v2(-555,355) -335,135 -335,21.46 ; R6.2@-420,21.46 -335,21.46 ; U1.12@-202.91,-481.46 -203.3,-481.46 -335,-349.76 -335,21.46
  Bottom Layer w7: v2(-1025,825) v2(-555,355)
H1: J7.11 P16.12 R5.1 U1.13 | length 2146.3
  Top Layer w7: P16.12@-1291.34,1012.99 -1250,1012.99 -1135,897.99 v2(-1135,495) ; R5.1@-670,76.46 v2(-670,25) -637,-8 -437,-8 -360,-85 -360,-352.2 U1.13@-216.83,-495.38
  Bottom Layer w7: v2(-1135,495) -670,30 v2(-670,25)
  other v2: -1295.28,1012.99
HD_5V: F2.1 J4.1 J7.1 J8.1 P3.2 P16.2 R21.2 U3.3 | length 4559.9
  Top Layer w25: P16.2@-1291.34,1512.99 -1290,1514.33 -1290,1580 -1230,1640 -160,1640 -35,1515 -35,1450 2.17,1412.83 J8.1@2.17,1341.73 ; J8.1@2.15,1341.71 2.15,1257.85 35,1225 405,1225 480,1150 v2(480,340) ; v2(815,250) 815,194.25 R21.2@815.16,194.09 ; v2(1170,30) 1170,-210 1210,-250 1370,-250 1442.91,-322.91 1447.91,-322.91 1460,-335 v2(1460,-340)
  Bottom Layer w35: v2(480,340) 480.35,340.35 U3.3@520.16,340.35 603.35,340.35 F2.1@623,360 648,335 648,287 685,250 v2(815,250) 1035,250 1170,115 v2(1170,30)
  other v2: 1545,-340 1503.94,-337.6 -1290.67,1513.66 -1335,1515 -1250,1515
HD_Vin: F1.1 J3.24 P2.23 R23.2 U2.1 | length 2065.5
  Top Layer w35: R23.2@933.27,194.09 933.27,198.19 935,199.92 935,269.97 950.92,285.89 v2(950.92,290.64)
  Bottom Layer w25: U2.1@768.78,750 768.78,687.41 813.19,643 F1.1@960,643 ; v2(950.92,290.64) 913.49,328.06 886.94,328.06 850,365 850,485 960,595 F1.1@960,643 ; v2(1500,1494.88) 1484.25,1494.88 1469.57,1480.2 1469.57,1479.57 1440,1450 1225,1450 1159.05,1384.05 1159.05,869.05 1025,735 985,735 960,710 F1.1@960,643
  other v2: 1460,1495 1540,1495
LED_STLINK: J10.1 R27.1 R29.1 U4.30 | length 1087.4
  Top Layer w7: J10.1@-543.9,1025.79 -543.9,1041.54 -542.13,1043.31 -510.43,1075 v2(-355,1075) ; U4.30@8.07,853.54 8.07,998.07 85,1075 v2(90,1075)
  Top Layer w9: J10.1@-542.13,1043.31 R29.1@-542.13,1130.12 R27.1@-542.13,1208.86
  Bottom Layer w7: v2(-355,1075) v2(90,1075)
M_MCU_BOOT0: P1.3 U1.94 | length 1276.2
  Top Layer w7: v2(-843.9,-926.1) -678.9,-926.1 -630,-975 -498.92,-975 -491.64,-982.28 v2(-370,-982.28) ; v2(85,-460) 85,-457.93 129.77,-413.16 U1.94@129.77,-411.86
  Bottom Layer w7: v2(-370,-982.28) -370,-912.32 82.32,-460 v2(85,-460)
MCU-RESET: R4.1 SW2.2 U1.14 | length 1274.4
  Top Layer w7: R4.1@-680,341.46 -680,285 -790,175 SW2.2@-790,103.11 -790,40 -710,-40 -460,-40 -385,-115 -385,-353.34 -316.66,-421.68 -316.66,-423.38 U1.14@-230.75,-509.3
NetC8_2: C8.2 U1.49 | length 151.7
  Top Layer w7: C8.2@-143,-1197.47 -143,-1158.28 -63.71,-1079 U1.49@-63.71,-1078.6
NetC13_2: C13.2 U1.73 | length 251.8
  Top Layer w7: U1.73@352.48,-786.29 399.18,-833 429.44,-833 459.44,-803 C13.2@572.47,-803
NetC16_2: C16.2 R5.2 Y1.1 | length 140.8
  Top Layer w7: R5.2@-670,133.54 -668.98,132.53 C16.2@-608,132.53 -585.85,154.68 -565.13,154.68 Y1.1@-546.5,173.31
NetC17_2: C17.2 R6.1 Y1.3 | length 132.2
  Top Layer w7: C17.2@-487.47,23 -487.47,82.72 Y1.3@-483.5,86.69 -437.13,86.69 -436.3,85.87 -427.33,85.87 R6.1@-420,78.54
NetC18_2: C18.2 R8.2 Y2.1 | length 134.7
  Top Layer w7: C18.2@-1087,-362.53 -1035.87,-362.53 -1028.54,-355.2 R8.2@-1028.54,-350 -1028.54,-306.66 -1012.36,-290.47 Y2.1@-1010.59,-290.47
NetC19_2: C19.2 R9.1 Y2.2 | length 157.2
  Top Layer w7: C19.2@-1088,-187.47 -1015.17,-187.47 Y2.2@-1010.59,-192.05 -940.59,-192.05 R9.1@-935,-186.46
NetC20_2: C20.2 D2.C J1.2 Q1.3 | length 508.5
  Bottom Layer w35: Q1.3@436.18,1167.4 436.18,1168.82 435,1170 436.18,1171.18 436.18,1284.45 D2.C@456.73,1305 468.94,1305 587.94,1424 C20.2@638.6,1424 638.6,1483.84 J1.2@588.78,1533.66
NetD1_2: D1.2 R1.1 | length 61.2
  Top Layer w9: D1.2@520,133.5 522.95,136.46 R1.1@580,136.46
NetD2_A: D2.A D4.A | length 113.5
  Bottom Layer w35: D2.A@623.27,1305 D4.A@736.73,1305
NetD3_A: D3.A Q1.1 R12.2 | length 238
  Bottom Layer w35: Q1.1@535,1204.8 547.2,1204.8 575.08,1176.93 D3.A@660,1176.93 744.61,1176.93 R12.2@756.54,1165
NetD3_K: D3.K Q1.2 Q2.2 Q3.2 R11.2 | length 748.8
  Bottom Layer w30: R11.2@461.54,1045 461.54,1096.54 495,1130 573.07,1130 632.09,1070.98 632.09,1061.62 650.65,1043.07 D3.K@660,1043.07 719.06,1043.07 763.39,1087.4 781.02,1087.4 784.41,1084.02 784.41,1079.02 794.41,1069.02 794.41,1060.59 845,1010 960,1010 1008.09,1058.09 1016.52,1058.09 1022.4,1063.98 Q2.2@1022.4,1064.41
NetD5_K: D5.K Q3.1 R11.1 | length 364.4
  Bottom Layer w35: R11.1@528.46,1045 532.62,1040.85 532.62,1036.91 545.12,1024.41 587.43,982.1 775.59,982.1 Q3.1@775.59,1012.6 ; D5.K@766.93,915 766.93,973.44
NetD6_2: D6.2 R20.1 | length 60.3
  Top Layer w9: D6.2@637.99,134.06 640.94,137.01 R20.1@697.05,137.01
NetD7_2: D7.2 R21.1 | length 60.3
  Top Layer w22.5: D7.2@756.1,134.06 759.06,137.01 R21.1@815.16,137.01
NetD8_1: D8.1 R24.2 | length 80.8
  Top Layer w9: R24.2@-263.54,-25 -263.54,36.78 -250.33,50 D8.1@-250,50
NetD9_2: D9.2 R23.1 | length 59.8
  Top Layer w31.5: D9.2@874.21,135.31 875.91,137.01 R23.1@933.27,137.01
NetD10_A: D10.A J9.2 | length 190.8
  Top Layer w15: D10.A@542.32,864.37 542.32,1039.57 J9.2@553.35,1050.59
NetD11_A: D11.A J10.2 | length 85.6
  Top Layer w9: D11.A@-552.95,739.17 -552.95,812.01 J10.2@-543.9,821.06
NetD12_A: D12.A J11.2 | length 75.8
  Top Layer w9: D12.A@-907.28,749.02 -898.23,758.07 J11.2@-898.23,821.06
NetD13_1: D13.1 R27.2 | length 97.4
  Top Layer w9: R27.2@-485.04,1208.86 D13.1@-387.6,1208.86
NetD14_2: D14.2 R29.2 | length 97.4
  Top Layer w9: R29.2@-485.04,1130.12 D14.2@-387.6,1130.12
NetD15_2: D15.2 R30.2 | length 97.4
  Top Layer w9: R30.2@-918.11,1553.35 D15.2@-820.67,1553.35
NetF1_0: F1.0 Q2.3 | length 167.5
  Bottom Layer w30: F1.0@960,808.41 960,928.39 985,953.39 Q2.3@985,965.59
NetF2_0: F2.0 U2.2 | length 198.1
  Bottom Layer w20: U2.2@768.78,550 788.41,530.37 F2.0@788.41,360
NetF3_0: F3.0 U3.2 U3.4 | length 352
  Bottom Layer w25: F3.0@321,80 400.35,80 U3.4@430,109.65 U3.2@430,340.35
NetJ12_1: J12.1 R32.2 | length 148.4
  Top Layer w7: J12.1@235,237.6 235,278.94 270,313.94 R32.2@270,371.46
NetJ12_3: J12.3 R33.2 | length 160.8
  Top Layer w7: J12.3@135,237.6 135,278.94 200,343.94 R33.2@200,371.46
NetJ13_1: J13.1 J13.2 R26.1 | length 303
  Top Layer w9: R26.1@-918.11,1474.61 -918.11,1467.72 -908.86,1458.46 J13.2@-908.86,1380.12 J13.1@-908.86,1175.39
NetJ13_5: J13.5 J13.6 R31.2 | length 328.3
  Top Layer w9: R31.2@-753.54,1470 -753.54,1438.78 -725.81,1411.05 -724.04,1411.05 -708.86,1395.87 J13.6@-708.86,1380.12 -708.86,1364.37 -725.92,1347.31 -725.92,1212.99 -724.04,1211.12 -724.04,1190.58 J13.5@-708.86,1175.39
NetP1_1: P1.1 P1.2 R7.1 | length 328.7
  Top Layer w7: P1.2@-1056.5,-1026.1 P1.1@-843.9,-1026.1 -735.35,-1026.1 R7.1@-730,-1031.46
NetP1_5: P1.5 P1.6 R10.2 | length 317.5
  Top Layer w7: P1.6@-1056.5,-826.1 P1.5@-843.9,-826.1 -742.44,-826.1 R10.2@-740,-828.54
NetP19_3: P19.3 P19.5 | length 100
  Top Layer w7: P19.5@755,-308.7 P19.3@855,-308.7
NetP19_4: P19.4 P19.6 | length 100
  Top Layer w7: P19.6@755,-521.3 P19.4@855,-521.3
NetQ2_1: Q2.1 Q3.3 R13.2 | length 203.8
  Bottom Layer w35: R13.2@896.54,1165 896.54,1071.69 874.84,1050 Q3.3@874.41,1050 880.3,1055.89 939.51,1055.89 947.6,1063.98 Q2.1@947.6,1064.41
NetR2_2: R2.2 R3.2 SW1.1 | length 222.4
  Top Layer w7: R3.2@-1370,-91.46 -1265.43,-91.46 SW1.1@-1260,-96.89 -1150.43,-96.89 R2.2@-1150,-96.46
NetR25_2: R25.2 U4.27 | length 112.9
  Top Layer w7: R25.2@51.46,960 51.46,953.11 67.13,937.44 U4.27@67.13,853.54
RST-STM8: J9.1 U4.18 | length 662.9
  Top Layer w7: v2(87.36,677.36) U4.18@164.57,677.36 ; v2(205,1050) 348.03,1050 J9.1@348.62,1050.59
  Bottom Layer w7: v2(87.36,677.36) 122.36,677.36 140,695 140,985 v2(205,1050)
STL-RESET: R28.1 SW3.2 U4.7 | length 745.3
  Top Layer w7: R28.1@-552.95,451.97 SW3.2@-429.92,451.97 ; SW3.2@-425,456.89 -422.78,459.11 -114.11,459.11 v2(-95,440) ; v2(-15,365) 8.07,388.07 U4.7@8.07,520.87
  Top Layer w9: SW3.2@-429.92,451.97 SW3.2@-425,456.89
  Bottom Layer w7: v2(-95,440) -92.5,440 -17.5,365 v2(-15,365)
STL_BOOT0: J13.3 U4.44 | length 864.4
  Top Layer w7: J13.3@-808.86,1175.39 -808.86,1159.65 -725.4,1076.19 v2(-668.81,1076.19) ; v2(-276.31,683.69) -250.58,657.96 -168.39,657.96 U4.44@-168.11,657.68
  Bottom Layer w7: v2(-668.81,1076.19) v2(-276.31,683.69)
STL_BOOT1: J13.4 U4.20 | length 1277.9
  Top Layer w7: J13.4@-808.86,1380.12 -808.86,1364.37 -769.49,1325 v2(-765,1325) ; v2(103.27,716.73) U4.20@164.57,716.73
  Bottom Layer w7: v2(-765,1325) -725,1285 -655,1285 -388.99,1018.99 -388.99,983.99 -121.73,716.73 v2(103.27,716.73)
STL_OSC_IN: C32.2 U4.5 Y3.3 | length 623.6
  Top Layer w7: Y3.3@-222.24,222.64 -226.21,226.61 C32.2@-294.05,226.61 -316.61,226.61 -335,245 -335,305 -310,330 -140.27,330 -31.3,438.97 -31.3,496.01 -30,497.31 U4.5@-30,520.87
STL_OSC_OUT: C31.2 U4.6 Y3.1 | length 334.5
  Top Layer w7: Y3.1@-135.63,285.63 -67.8,285.63 C31.2@-63.83,281.66 -63.83,361.17 -11.61,413.39 -11.61,496.01 -11,496.62 U4.6@-11,520.87
STL_RX: J9.3 J10.3 U4.31 | length 1040.3
  Top Layer w7: J10.3@-443.9,1025.79 -443.11,1025 v2(-305,1025) ; U4.31@-11.61,853.54 -11.61,1018.39 v2(10,1040) 120.59,1150.59 J9.3@348.62,1150.59
  Bottom Layer w7: v2(-305,1025) -5,1025 v2(10,1040)
STL_SWCLK: J11.1 U4.37 | length 834.7
  Top Layer w7: J11.1@-898.23,1025.79 -898.23,1010.04 -778.19,890 -385,890 -290.47,795.47 U4.37@-168.11,795.47
STL_SWDIO: J11.3 U4.34 | length 838.2
  Top Layer w7: J11.3@-798.23,1025.79 -792.44,1020 -680,1020 -605,945 -95,945 -86.42,936.42 -70.67,920.67 U4.34@-70.67,853.54
STM32_SWCLK: R33.1 U4.26 | length 1097.9
  Top Layer w7: U4.26@86.81,853.54 86.81,929.56 84.22,932.15 84.22,983.31 92.12,991.22 308.78,991.22 360,940 360,470.91 293.31,404.22 231.22,404.22 206.89,428.54 R33.1@200,428.54
STM32_SWDIO: R25.1 R32.1 U4.25 | length 1095.4
  Top Layer w7: U4.25@106.5,853.54 106.5,957.95 R25.1@108.54,960 253.46,960 325.75,887.71 325.75,777.69 325.75,747.19 cw(c312.25,747.19) 312.25,733.69 307.36,733.69 ccw(c307.36,720.19) 307.36,706.69 327.61,706.69 cw(c327.61,693.19) 327.61,679.69 307.36,679.69 ccw(c307.36,666.19) 307.36,652.69 327.61,652.69 cw(c327.61,639.19) 327.61,625.69 307.36,625.69 ccw(c307.36,612.19) 307.36,598.69 327.61,598.69 cw(c327.61,585.19) 327.61,571.69 307.36,571.69 ccw(c307.36,558.19) 307.36,544.69 312.25,544.69 cw(c312.25,531.19) 325.75,531.19 325.75,505.72 325.75,477.41 276.89,428.54 R32.1@270,428.54
pads on no net: J2. J5. J8.4 J8.MH1 J8.MH2 P4.MP1 P4.MP2 P5.MP1 P5.MP2 P6.MP1 P6.MP2 P7.MP1 P7.MP2 P8.MP1 P8.MP2 P9.MP1 P9.MP2 P10.MP1 P10.MP2 P11.MP1 P11.MP2 P12.MP1 P12.MP2 P13.MP1 P13.MP2 P14.MP1 P14.MP2 U4.1 U4.2 U4.3 U4.4 U4.10 U4.11 U4.12 U4.13 U4.14 U4.15 U4.16 U4.17 U4.19 U4.21 U4.22 U4.28 U4.29 U4.38 U4.39 U4.40 U4.41 U4.42 U4.43 U4.45 U4.46

## Polygon pours and split planes (outlines as drawn)
NetF3_0 on Bottom Layer "NETF3_0_L02_P002" (solid, pour order 2): 525,225 395,225 285,115 285,20 525,20
GND on Bottom Layer "GND_L02_P001" (solid, pour order 1): 1766.95,-1847.05 1766.25,-1846.35 1766.25,1687.78 1766.03,1688 -1766.63,1688 -1766.66,1687.98 -1766.66,-1845.25
GND on Top Layer "GND_L01_P000" (solid, pour order 0): 1766.78,-1845.64 1766.47,-1845.32 1766.47,1687.82 1766.42,1687.87 -1766.54,1687.87 -1766.68,1687.72 -1766.68,-1845.32

## Silkscreen, mask and mechanical layers (free items; w line width, h text height)
Drill Guide:
  the board outline again, w10